# Altium PCB PCB2.PcbDoc
Units mil, origin at the board's own origin, x right, y up, seen from the top; angles counter-clockwise.
Board outline 2244.09 x 1653.54 mil, 2 copper layers (Top Layer, Bottom Layer); 32 components, 17 nets, 84 pads, 20 vias.
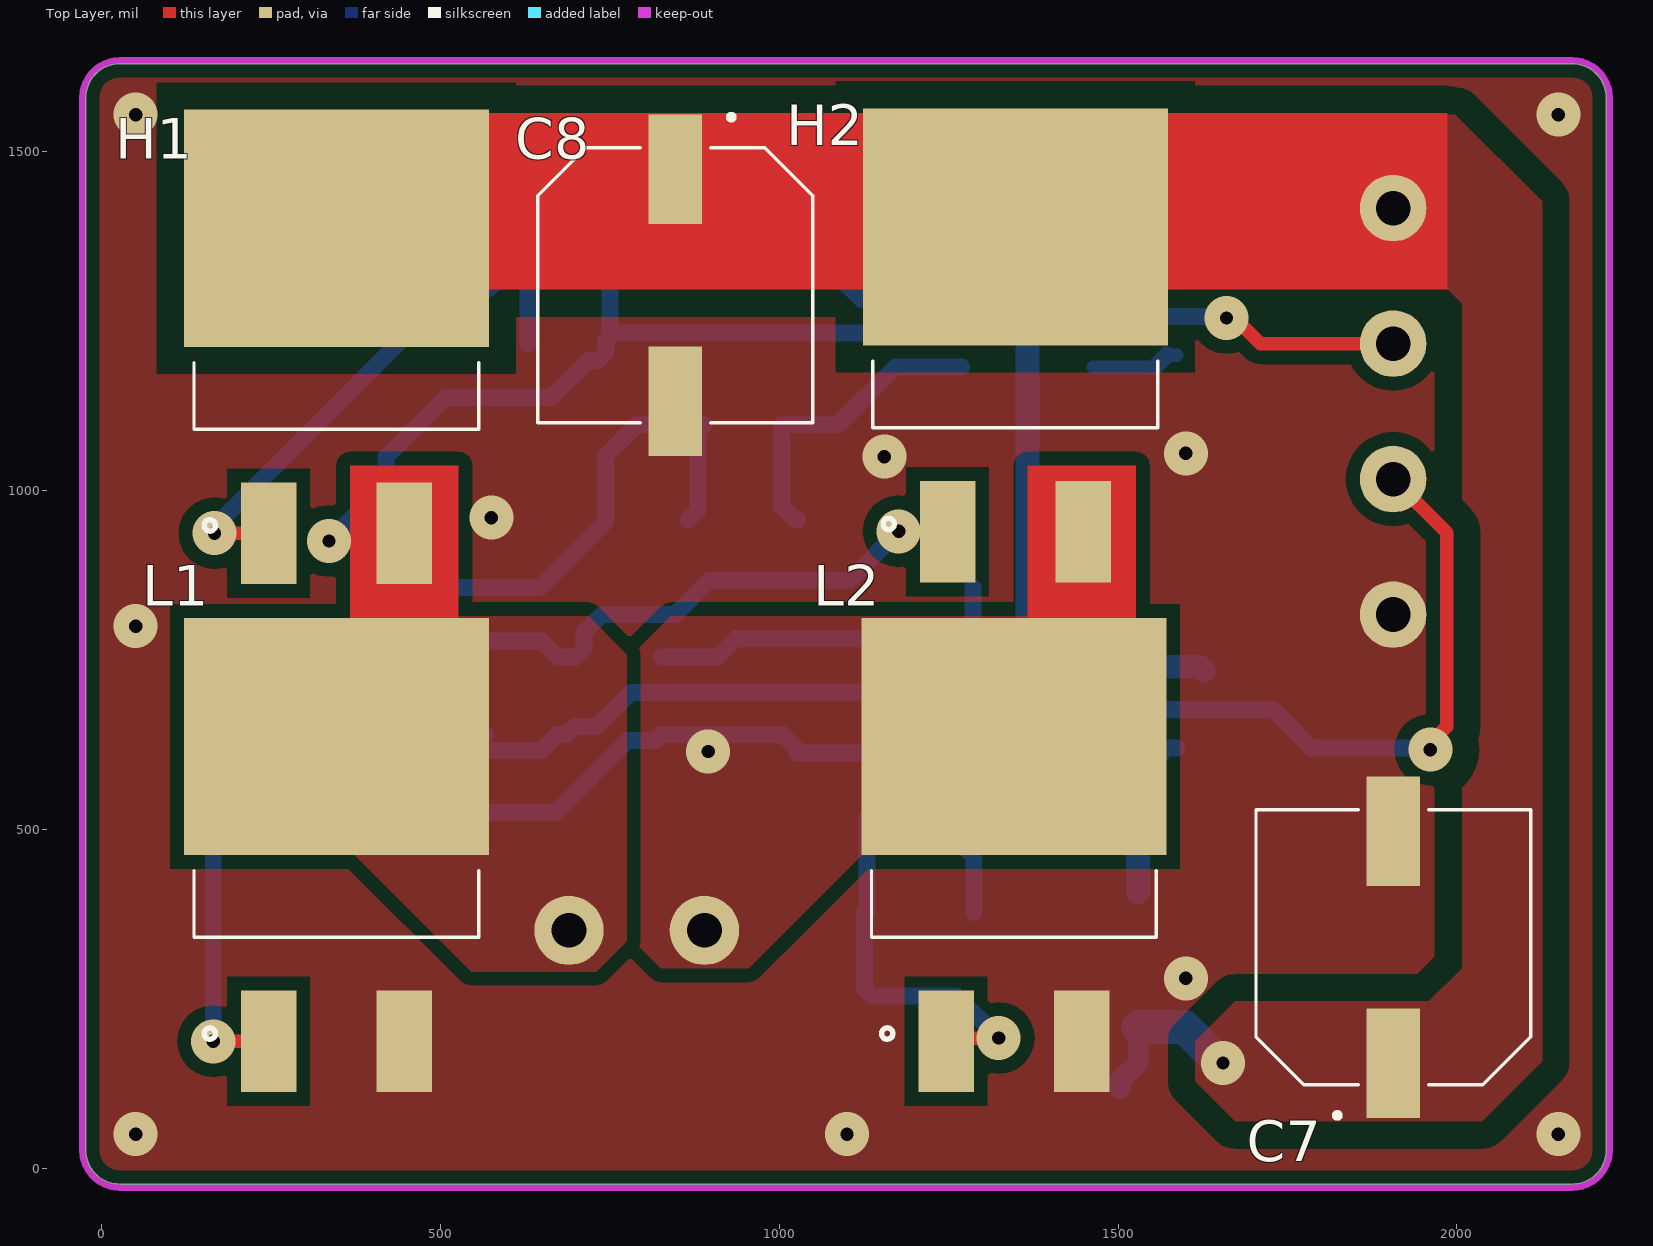
[diagram p0: Top Layer view]
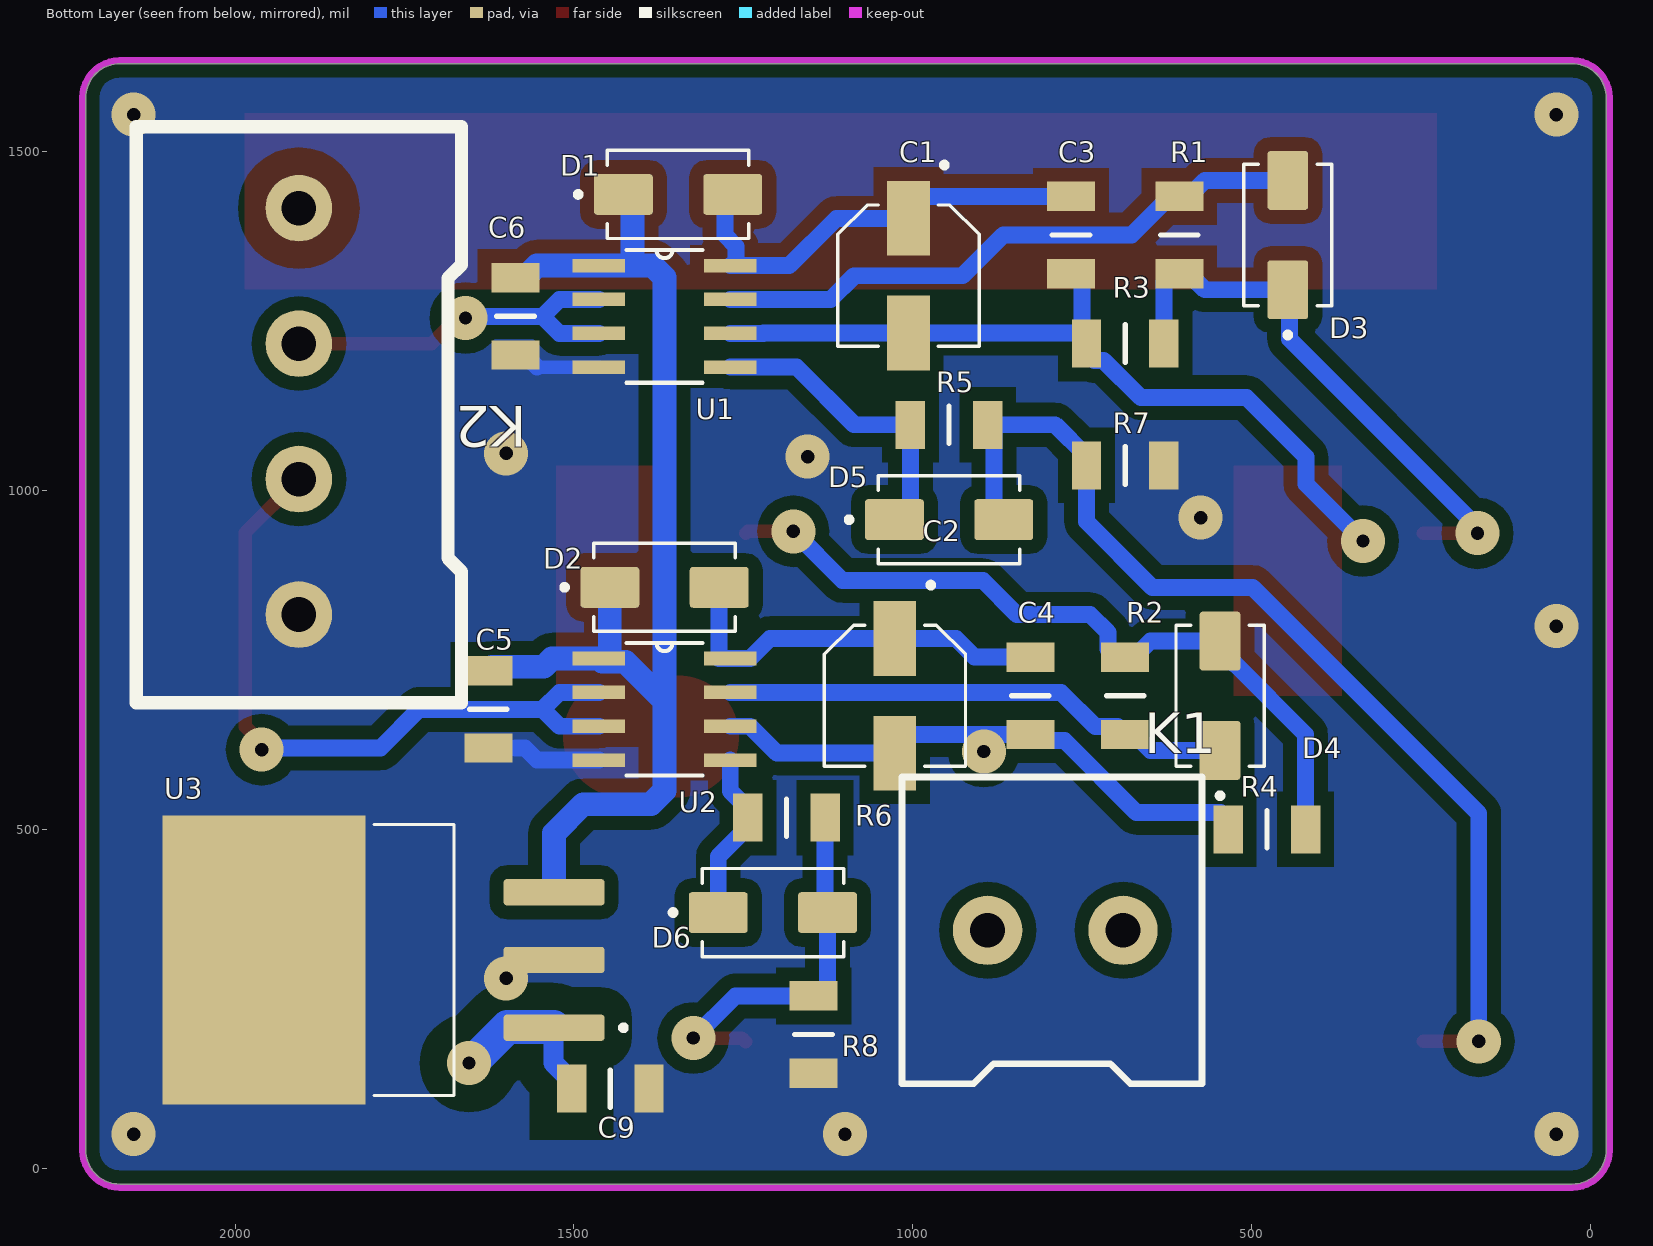
[diagram p1: Bottom Layer view, seen from below]

## Layer stack, top to bottom
Top Solder: solder mask 0.4, Solder Resist, Dk 3.5
Top Layer: signal copper 1.4
Dielectric 1: dielectric 12.6, FR-4, Dk 4.8
Bottom Layer: signal copper 1.4
Bottom Solder: solder mask 0.4, Solder Resist, Dk 3.5

## Board outline
-23.61,26.39 -23.61,1579.93 cw(c26.39,1579.93) 26.39,1629.93 2170.48,1629.93 cw(c2170.48,1579.93) 2220.48,1579.93 2220.48,26.39 cw(c2170.48,26.39) 2170.48,-23.61 26.39,-23.61 cw(c26.39,26.39)

## Design rules (kind name [scope] priority, off if disabled: settings)
Clearance Clearance_1 [InNet('VCC')] p1: gap=40 ignorepadtopadclearanceinfootprint=FALSE
Clearance [All] p2: gap=20 ignorepadtopadclearanceinfootprint=FALSE
PolygonConnect [All] p1: connectstyle=Direct reliefconductorwidth=10 reliefentries=4 polygonreliefangle="90 Angle" airgapwidth=10
RoutingVias [All] p1: holewidth=28 width=50 viastyle="Through Hole" minholewidth=28 minwidth=50 maxholewidth=28 maxwidth=50
SolderMaskExpansion [All] p1: expansion=4 istentingtop=FALSE
Width [All] p1: maxlimit=200 minlimit=10 preferedwidth=10 minimp=50.000000 maximp=50.000000 favimp=50.000000
30 further rules are at their usual default settings.

## Components (designator, comment, footprint, x,y, rotation, side; value= is the part's Value field where it differs from the comment)
C1 "22uF" 22uF-50V_CAP_EEEFN1H220UR 1006.31,1317.18 r270 bottom
C2 "22uF" 22uF-50V_CAP_EEEFN1H220UR 1026.31,697.18 r270 bottom
C3 "100nF" "1206 PACKAGE" 766.31,1377.18 r90 bottom
C4 "100nF" "1206 PACKAGE" 826.31,697.18 r90 bottom
C5 "100nF" "1206 PACKAGE" 1626.31,677.18 r90 bottom
C6 "100nF" "1206 PACKAGE" 1586.31,1257.18 r90 bottom
C7 "220uF" 220uF 1906.31,325.92 r90 top
C8 "220uF" 220uF 846.46,1303.15 r270 top
C9 "330nF" "1206 PACKAGE" 1446.31,117.18 r180 bottom
D1 "Diode" FR1M-13 1346.31,1437.18 r180 bottom
D2 "Diode" FR1M-13 1366.31,857.18 r180 bottom
D3 "D3" FR1M-13 446.31,1377.18 r90 bottom
D4 "D4" FR1M-13 546.31,697.18 r90 bottom
D5 "D5" FR1M-13 946.31,957.18 r180 bottom
D6 "D6" FR1M-13 1206.31,377.18 r180 bottom
H1 "IRF3205S_PBF" 3205pbf 346.31,1218.28 r0 top
H2 "IRF3205S_PBF" 3205pbf 1348.43,1220.47 r0 top
K1 "2_pin_male_header" "2 pin Terminal" 789.46,350.91 r180 bottom
K2 "4 Pin Klemens PCB" "4pin Terminal" 1906,1117 r90 bottom
L1 "IRF3205S_PBF" 3205pbf 346.31,468.28 r0 top
L2 "IRF3205S_PBF" 3205pbf 1346.31,468.28 r0 top
R1 "10R" "1206 PACKAGE" 606.31,1377.18 r270 bottom
R2 "10R" "1206 PACKAGE" 686.31,697.18 r270 bottom
R3 "CRCW12061K00FKEAHP" "1206 PACKAGE" 686.31,1217.18 r0 bottom
R4 "CRCW12061K00FKEAHP" "1206 PACKAGE" 477.09,500 r180 bottom
R5 "10R" "1206 PACKAGE" 946.31,1097.18 r180 bottom
R6 "10R" "1206 PACKAGE" 1186.31,517.18 r0 bottom
R7 "CRCW12061K00FKEAHP" "1206 PACKAGE" 686.31,1037.18 r180 bottom
R8 "CRCW12061K00FKEAHP" "1206 PACKAGE" 1146.31,197.18 r90 bottom
U1 "IR2103SPBF" 2103SMD-8SOIC 1366.31,1257.18 r180 bottom
U2 "IR2103SPBF" 2103SMD-8SOIC 1366.31,677.18 r180 bottom
U3 "LM7812S/NOPB" lm7812 1806.31,317.18 r90 bottom

## Footprints (in the part's own frame and the unit in brackets; to place one, negate y for a bottom-side part, rotate by r counter-clockwise, add the part's x,y. Pads: shape width x height; smd on the part's side, far side on the other; paste and mask are expansions set on the pad)
"2 pin Terminal" [mm]
  round 2.6 hole 1.3 mask+0.051: 1(-2.54,0) 2(2.54,0)
  silkscreen extent -5.75,-5.75 5.5,5.75, body extent -5.5,-5.6 5.23,5.6, height 19.34
"4pin Terminal" [mm]
  round 2.5 hole 1.3 mask+0.051: 1(-7.62,0) 2(-2.54,0) 3(2.54,0) 4(7.62,0)
  silkscreen extent -10.92,-6.1 10.67,6.1, body extent -10.16,-5.74 10.79,5.46, height 19.34
22uF-50V_CAP_EEEFN1H220UR [mm] "22uF 50V electrolytic smd kondansator"
  rect 2.8x1.6 smd: 1(-2.15,0) 2(2.15,0)
  silkscreen extent -4.25,-2.65 2.65,2.65, body extent -3,-2.65 3,2.65, height 5.8
220uF [mm] "220uF_50V_smd_capacitor"
  rect 4.1x2 smd: 1(-4.35,0) 2(4.35,0)
  silkscreen extent -6.4,-5.15 5.15,5.15, body extent -5.85,-5.15 5.85,5.15, height 10.19
"1206 PACKAGE" [mm] "PACKAGE FOR RESISTOR AND CAPACITOR"
  rect 1.1x1.8 smd: 1(-1.45,0) 2(1.45,0)
  silkscreen extent 0,-0.7 0,0.7, body extent -1.42,-0.8 1.68,0.8, height 0.65
2103SMD-8SOIC [mil]
  rect 78x20 smd: 1(-97,75) 2(-97,25) 3(-97,-25) 4(-97,-75) 5(97,-75) 6(97,-25) 7(97,25) 8(97,75)
  silkscreen extent -56,-98 56,98, body extent -118,-98 118,98, height 69
3205pbf [mm]
  rect 2.08x3.81 smd: 1(-2.54,-7.14) 3(2.54,-7.14)
  rect 11.43x8.89 smd: 2(0,4.29)
  silkscreen extent -5.34,-7.06 5.34,-0.74, body extent -5.08,-7.62 5.08,7.62, height 4.83
FR1M-13 [mm] "1000V 1A DIODE"
  rrect15% 2.21x1.53 smd: A(2.05,0) C(-2.05,0)
  silkscreen extent -3.85,-1.65 2.65,1.65, body extent -2.65,-1.81 2.65,1.81, height 2.5
lm7812 [mm]
  rrect25% 0.99x3.79 smd: 1(-2.794,-7.035) 2(-0.254,-7.035) 3(2.286,-7.035)
  rect 10.84x7.62 smd paste-6: 4(-0.254,3.845)
  silkscreen extent -5.33,-9.73 4.83,-0.29, body extent -5.33,-7.43 4.83,6.93, height 4.65

## Part data
C1 C2: "CAP ALUM 22UF 20% 50V SMD", Package="RADIAL-2 Panasonic", Availability="In Stock", Check_prices=https://www.snapeda.com/parts/EEE-FN1H220UR/Panasonic/view-part/6178088/?ref=eda, MF="Panasonic Electronic Components", MP=EEE-FN1H220UR, Price=None, Purchase-URL=https://pricing.snapeda.com/search/part/EEE-FN1H220UR/?ref=eda, SnapEDA_Link=https://www.snapeda.com/parts/EEE-FN1H220UR/Panasonic/view-part/6178088/?ref=snap, Urun kodu=EEEFN1H220UR
C3 C4 C5 C6: library part "100nF 50V SERAMIC CAPACITOR"
C7 C8: "CAP ALUM 220UF 20% 50V SMD", Package="RADIAL-2 Panasonic", Availability="In Stock", Check_prices=https://www.snapeda.com/parts/EEEFP1H221AL/Panasonic/view-part/5797279/?ref=eda, MF=Panasonic, MP=EEEFP1H221AL, Price=None, SnapEDA_Link=https://www.snapeda.com/parts/EEEFP1H221AL/Panasonic/view-part/5797279/?ref=snap, Urun adi=EEEFP1H221AL
C9: "330nF 50V seramic capacitor 1206 package"
D1 D2: library part "FR1MDITR DIODE", "Diode Standard 1000 V 1A Surface Mount SMB / https://www.digikey.si/en/products/detail/diodes-incorporated/FR1M-13/743555", manufacturer product number=FR1M-13, part number=FR1MDITR-ND
D3 D4 D5 D6: library part DIODE, "Diode Standard 1000 V 1A Surface Mount SMB / https://www.digikey.si/en/products/detail/diodes-incorporated/FR1M-13/743555"
H1 H2 L1 L2: "RoHS Compliant", Package="D2PAK Infineon", Availability=Unavailable, MF="Infineon Technologies", MP=IRF3205SPBF, Price=None, SnapEDA_Link=https://www.snapeda.com/parts/IRF3205SPBF/Infineon%20Technologies/view-part/576468/?ref=snap
K1: "TERM BLOCK 5.08MM 2POS SIDE ENTY", Package=None, Availability=Unavailable, MP=282837-2, Price=None
R1 R2 R5 R6: library part "10 1/4W", "10R 1/4W 1206 RESISTOR_1 CRCW Power Resistor 1206 0.5W 1K 1% Vishay CRCW Series Thick Film High Power Surface Mount Resistor 1206 Case 1k +/-1% 0.5W +/-100ppm/K", Manufacturer_Name=Vishay, Manufacturer_Part_Number=CRCW12061K00FKEAHP, Mouser Part Number=71-CRCW12061K00FKEAH, Datasheet Link=http://componentsearchengine.com/Datasheets/1/CRCW12061K00FKEAHP.pdf, Geometry.Height=0.65mm, Mouser Price/Stock=https://www.mouser.co.uk/ProductDetail/Vishay-Dale/CRCW12061K00FKEAHP?qs=AuiXZzjRd4VaQJAN1hHm0g%3D%3D
R3 R4 R7 R8: library part "1K 1/4W", "1K 1/4W 1206 RESISTOR       CRCW Power Resistor 1206 0.5W 1K 1% Vishay CRCW Series Thick Film High Power Surface Mount Resistor 1206 Case 1k +/-1% 0.5W +/-100ppm/K", Manufacturer_Name=Vishay, Mouser Part Number=71-CRCW12061K00FKEAH, Datasheet Link=http://componentsearchengine.com/Datasheets/1/CRCW12061K00FKEAHP.pdf, Geometry.Height=0.65mm, Manufacturer_Part_Number=CRCW12061K00FKEAHP, Mouser Price/Stock=https://www.mouser.co.uk/ProductDetail/Vishay-Dale/CRCW12061K00FKEAHP?qs=AuiXZzjRd4VaQJAN1hHm0g%3D%3D
U1 U2: "Floating channel designed for bootstrap operation", Package="SOIC-8 Infineon", Availability=Unavailable, MF=Infineon, MP=IR2103SPBF, Price=None, SnapEDA_Link=https://www.snapeda.com/parts/IR2103SPBF/Infineon%20Technologies/view-part/576530/?ref=snap
U3: "1.5-A, 30-V, linear voltage regulator 3-DDPAK/TO-263 0 to 125", Package="TO-263-3 Texas Instruments", Arrow_Electronics-Purchase-URL=https://snapeda.com/shop?store=Arrow+Electronics&id=559615, Availability=Unavailable, DigiKey-Purchase-URL=https://snapeda.com/shop?store=DigiKey&id=559615, MF="Texas Instruments", Mouser-Purchase-URL=https://snapeda.com/shop?store=Mouser&id=559615, MP=LM7812S/NOPB, Price=None, SnapEDA_Link=https://www.snapeda.com/parts/LM7812S/NOPB/Texas%20Instruments/view-part/559615/?ref=snap, Texas_Instruments-Purchase-URL=https://snapeda.com/shop?store=Texas+Instruments&id=559615
K2: Designed By=Bora

## Via types
v1: diameter 65, hole 19.68, Top Layer to Bottom Layer, 20 vias

## Nets (pads, with @x,y where several pads share a name; then routed paths per layer and width w, separated by ;. In a path a pad name is that pad's centre, name@x,y a point inside that pad or via, vN(x,y) a via of type N, cw(c..) or ccw(c..) an arc to the next point about the centre after c; other vN are vias at no path point)
+12: C5.2 C6.2 U1.1 U2.1 U3.3 | length 1786.4
  Bottom Layer w35: 1427.02,1437.18 1413.6,1423.75 1413.6,1332.18 ; 1447.02,857.18 1447.02,752.18 U2.1 1532.31,752.18 1544.49,740 1620.57,740 C5.2 ; U2.1@1458.31,747.18 1423.95,747.18 1366.31,689.53 ; U3.3 1529.34,494.14 1486.31,537.18 1386.31,537.18 1366.31,557.18 1366.31,689.53 ; C6.2 1572.53,1314.26 1554.62,1332.18 U1.1 1413.6,1332.18 ; 1366.31,689.53 1366.31,1314.6 1383.88,1332.18 1413.6,1332.18
GND: C5.1 C6.1 C7.2 C8.2 C9.2 K2.1 L1.3 L2.3 R7.2 R8.1 U1.4 U2.4 U3.2 U3.4 | length 260.8
  Bottom Layer w20: U1.4 C6.1@1554.62,1182.18 ; C6.1@1572.53,1200.09 C6.1
  Bottom Layer w25: U2.4 1554.62,602.18 1572.53,620.09 1586.31,620.09 ; C6.1@1554.62,1182.18 C6.1@1572.53,1200.09
  other v1: 50,50 50,50 1100,50 2150,50 1600,280 50,800 575,960 1155,1050 1600,1055 50,1555 2150,1555
HG1: H1.1 R1.2 R3.1 | length 844.1
  Top Layer w20: v1(166.31,937.18) H1.1
  Bottom Layer w25: v1(166.31,937.18) 172.05,942.92 172.05,952.05 443.81,1223.81 443.81,1293.97 446.31,1296.47 568.91,1296.47 592.53,1320.09 R1.2 617.57,1320.09 629.22,1308.44 R3.1
HG2: H2.1 R2.1 R4.2 | length 1133.2
  Top Layer w20: v1(1176.18,939.96) 1243.53,939.96 H2.1@1246.31,937.18
  Bottom Layer w25: R4.2 420,640 525.29,745.29 ; 526.19,744.38 546.31,764.5 546.31,777.88 648.91,777.88 672.53,754.26 R2.1 700.09,754.26 711.74,765.92 711.74,790.89 738.03,817.18 846.31,817.18 896.31,867.18 1103.4,867.18 v1(1176.18,939.96)
IN1: K2.3 U1.2 U1.3 | length 563
  Top Layer w20: v1(1660,1254.68) 1672.18,1254.68 1709.85,1217 K2.3
  Bottom Layer w25: U1.3 1521.31,1232.18 1546.31,1257.18 ; U1.2 1521.31,1282.18 1546.31,1257.18 ; v1(1660,1254.68) 1657.5,1257.18 1546.31,1257.18
IN2: K2.2 U2.2 U2.3 | length 1068.2
  Top Layer w20: K2.2 1985,938 1985,651.76 1960.94,627.71 v1(1960.94,617.55)
  Bottom Layer w25: U2.3 1521.31,652.18 1546.31,677.18 ; U2.2 1521.31,702.18 1546.31,677.18 ; v1(1960.94,617.55) 1958.62,619.88 1785.78,619.88 1728.48,677.18 1546.31,677.18
LG1: L1.1 R5.2 R7.1 | length 1587.1
  Top Layer w20: v1(164.43,187.18) L1.1
  Bottom Layer w25: v1(164.43,187.18) 164.43,523.58 498.03,857.18 646.31,857.18 743.4,954.26 R7.1 743.4,1050.96 789.62,1097.18 R5.2 880,1087.95 880,971.57 865.6,957.18
LG2: L2.1 R6.1 R8.2 | length 563.6
  Top Layer w20: L2.1@1246.31,186.23 1252.01,191.93 v1(1323.82,191.93)
  Bottom Layer w25: R6.1 1129.22,377.18 1125.6,377.18 1125.6,265.92 1137.25,254.26 1261.49,254.26 v1(1323.82,191.93)
M1: C1.2 C3.1 H1.3 K1.2 L1.2 R3.2 U1.6 | length 1430.8
  Top Layer w20: v1(335.33,925.64) 434.77,925.64 H1.3 462.26,937.18 479.28,920.15 479.28,870.15 466.31,857.18 446.31,857.18
  Bottom Layer w25: v1(335.33,925.64) 419.55,1009.87 419.55,1049.47 507.25,1137.18 663.4,1137.18 717.96,1191.74 731.74,1191.74 743.4,1203.4 R3.2 743.4,1220.88 755.05,1232.53 C1.2 1219.96,1232.53 1220.31,1232.18 U1.6 ; R3.2@750.01,1237.57 750.01,1308.44 761.66,1320.09 C3.1
M2: C2.2 C4.1 H2.3 K1.1 L2.2 R4.1 U2.6 | length 934.7
  Top Layer w180: L2.2 L2.2@1426.31,637.18
  Bottom Layer w20: K1.1@889.46,328.62 K1.1
  Bottom Layer w25: R4.1 534.17,513.35 545.83,525 670,525 775.94,630.94 817.16,630.94 C4.1 895,640.09 1004.81,640.09 1026.31,618.59 C2.2 1200.66,612.53 1240.31,652.18 U2.6
  other v1: 895,615
NetC1_1: C1.1 C3.2 U1.8 | length 677.2
  Bottom Layer w25: C3.2 984.81,1434.26 1006.31,1412.77 C1.1 1112.61,1401.82 1182.25,1332.18 U1.8 1260.54,1332.18 1260.54,1360.46 1277.25,1377.18 1277.25,1425.52 1265.6,1437.18
NetC2_1: C2.1 C4.2 U2.8 | length 588
  Bottom Layer w25: C4.2 908.67,754.26 936.23,781.82 C2.1 1210.66,781.82 1240.31,752.18 U2.8 1285.6,752.18 1285.6,857.18
NetD3_2: R1.1 U1.7 | length 895.8
  Bottom Layer w25: 446.31,1457.88 568.91,1457.88 592.53,1434.26 R1.1 620.09,1434.26 677.18,1377.18 866.31,1377.18 926.31,1317.18 1086.31,1317.18 1121.31,1282.18 U1.7
NetD4_2: R2.2 U2.7 | length 790.5
  Bottom Layer w25: 566.43,640.09 546.31,619.97 546.31,616.47 648.91,616.47 672.53,640.09 R2.2 697.96,651.74 730.48,651.74 780.92,702.18 U2.7
NetD5_2: R5.1 U1.5 | length 453
  Bottom Layer w25: 1027.02,957.18 1023.51,957.18 1003.4,977.29 R5.1 1086.31,1097.18 1171.31,1182.18 U1.5
NetD6_2: R6.2 U2.5 | length 253.8
  Bottom Layer w25: U2.5 1269.31,556.87 1243.4,530.96 R6.2 1243.4,503.4 1287.02,459.77 1287.02,377.18
VCC: C7.1 C8.1 C9.1 H1.2 H2.2 K2.4 U3.1 | length 250.3
  Bottom Layer w30: C9.1 1503.4,130.96 1510.05,137.61 1512.7,137.61 1530.28,155.18 U3.1@1530.28,208.11
  Bottom Layer w50: U3.1@1530.28,208.11 1597.83,208.11 1650.94,155 v1(1655,155)
pads on no net: D1.A D1.C D2.A D2.C D3.A D3.C D4.A D4.C D5.A D5.C D6.A D6.C

## Polygon pours and split planes (outlines as drawn)
GND on Top Layer "GND_L01_P021" (solid, remove dead copper, pour order 21): 15.76,1629.93 ccw(c15.76,1590.56) -23.61,1590.56 -23.61,15.76 ccw(c15.76,15.76) 15.76,-23.61 2181.11,-23.61 ccw(c2181.11,15.76) 2220.48,15.76 2220.48,1590.56 ccw(c2181.11,1590.56) 2181.11,1629.93
VCC on Top Layer "VCC_L01_P017" (solid, remove dead copper, pour order 17): 1984.27,1299.21 2007.87,1275.61 2007.87,295.28 1958.66,246.06 1673.23,246.06 1614.17,187.01 1614.17,127.95 1673.23,68.9 2037.4,68.9 2125.98,157.48 2125.98,1427.17 1998.03,1555.12 1929.13,1555.12 1929.13,1299.21
M1 on Top Layer "M1_L01_P016" (solid, remove dead copper, pour order 16): 545,290 370,465 370,814.47 718.5,814.47 775,757.97 775,335 730,290
M2 on Top Layer "M2_L01_P020" (solid, remove dead copper, pour order 20): 1023.62,363.62 1127.52,467.52 1377.95,467.52 1377.95,814.47 839.47,814.47 785,760 785,335 825,295 955,295
GND on Bottom Layer "GND_L02_P013" (solid, remove dead copper, pour order 13): 2181.35,-24 ccw(c2181.35,15.37) 2220.72,15.37 2220.72,1590.17 ccw(c2181.35,1590.17) 2181.35,1629.54 16,1629.54 ccw(c16,1590.17) -23.37,1590.17 -23.37,15.37 ccw(c16,15.37) 16,-24

## Keep-outs
Keep-Out Layer:
  lines w10: -28.61,26.39 ccw(c26.39,26.39) 26.39,-28.61 2170.48,-28.61 ccw(c2170.48,26.39) 2225.48,26.39 2225.48,1579.93 ccw(c2170.48,1579.93) 2170.48,1634.93 26.39,1634.93 ccw(c26.39,1579.93) -28.61,1579.93 -28.61,26.39

## Other copper
Top Layer:
  rectangle net VCC: 226.31,1297.18 1986.31,1557.18
  rectangle net M1: 366.31,697.18 526.31,1037.18
  rectangle net M2: 1366.31,697.18 1526.31,1037.18